# Altium PCB PCB_MCU.PcbDoc (part 1 of 2)
Units mil, origin at the board's own origin, x right, y up, seen from the top; angles counter-clockwise.
Board outline 6125 x 4280 mil, 4 copper layers (Top Layer, Layer 1, Layer 2, Bottom Layer), stack 64.567 mil thick; 69 components, 43 nets, 240 pads, 64 vias.
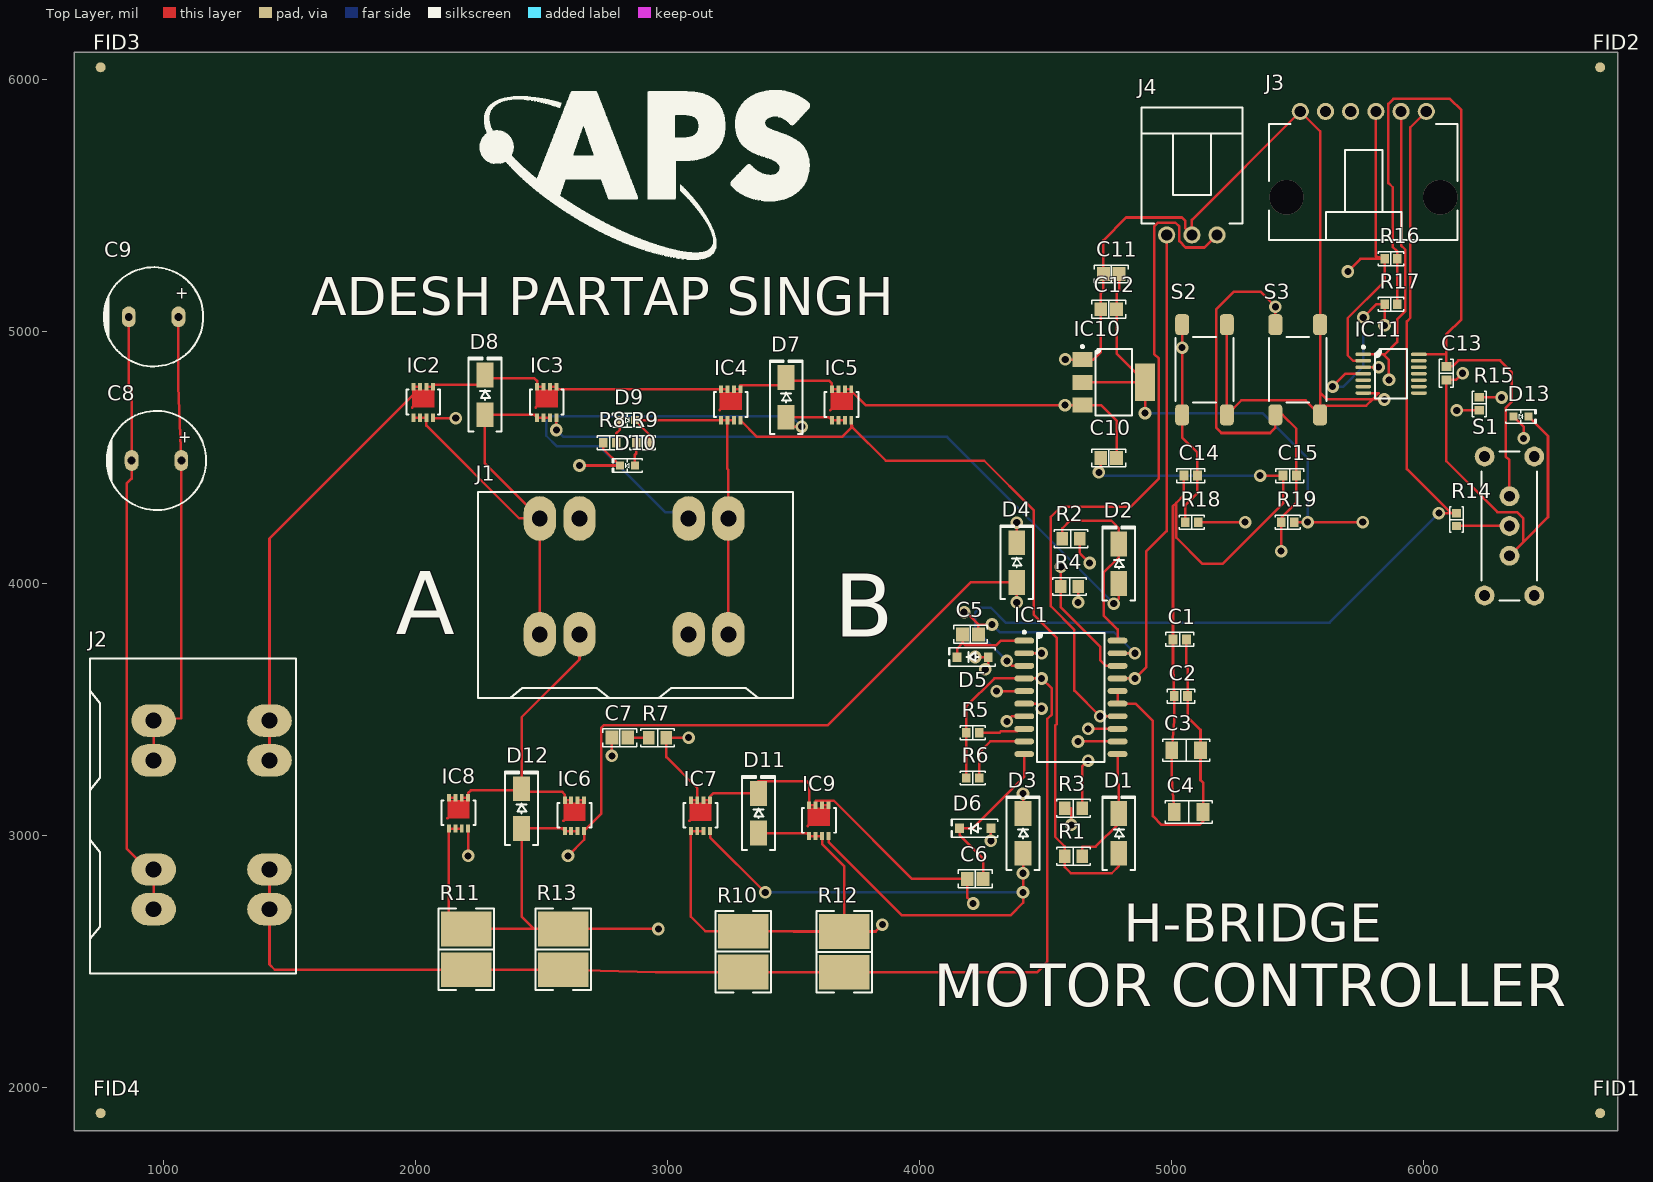
[diagram p0: Top Layer view]
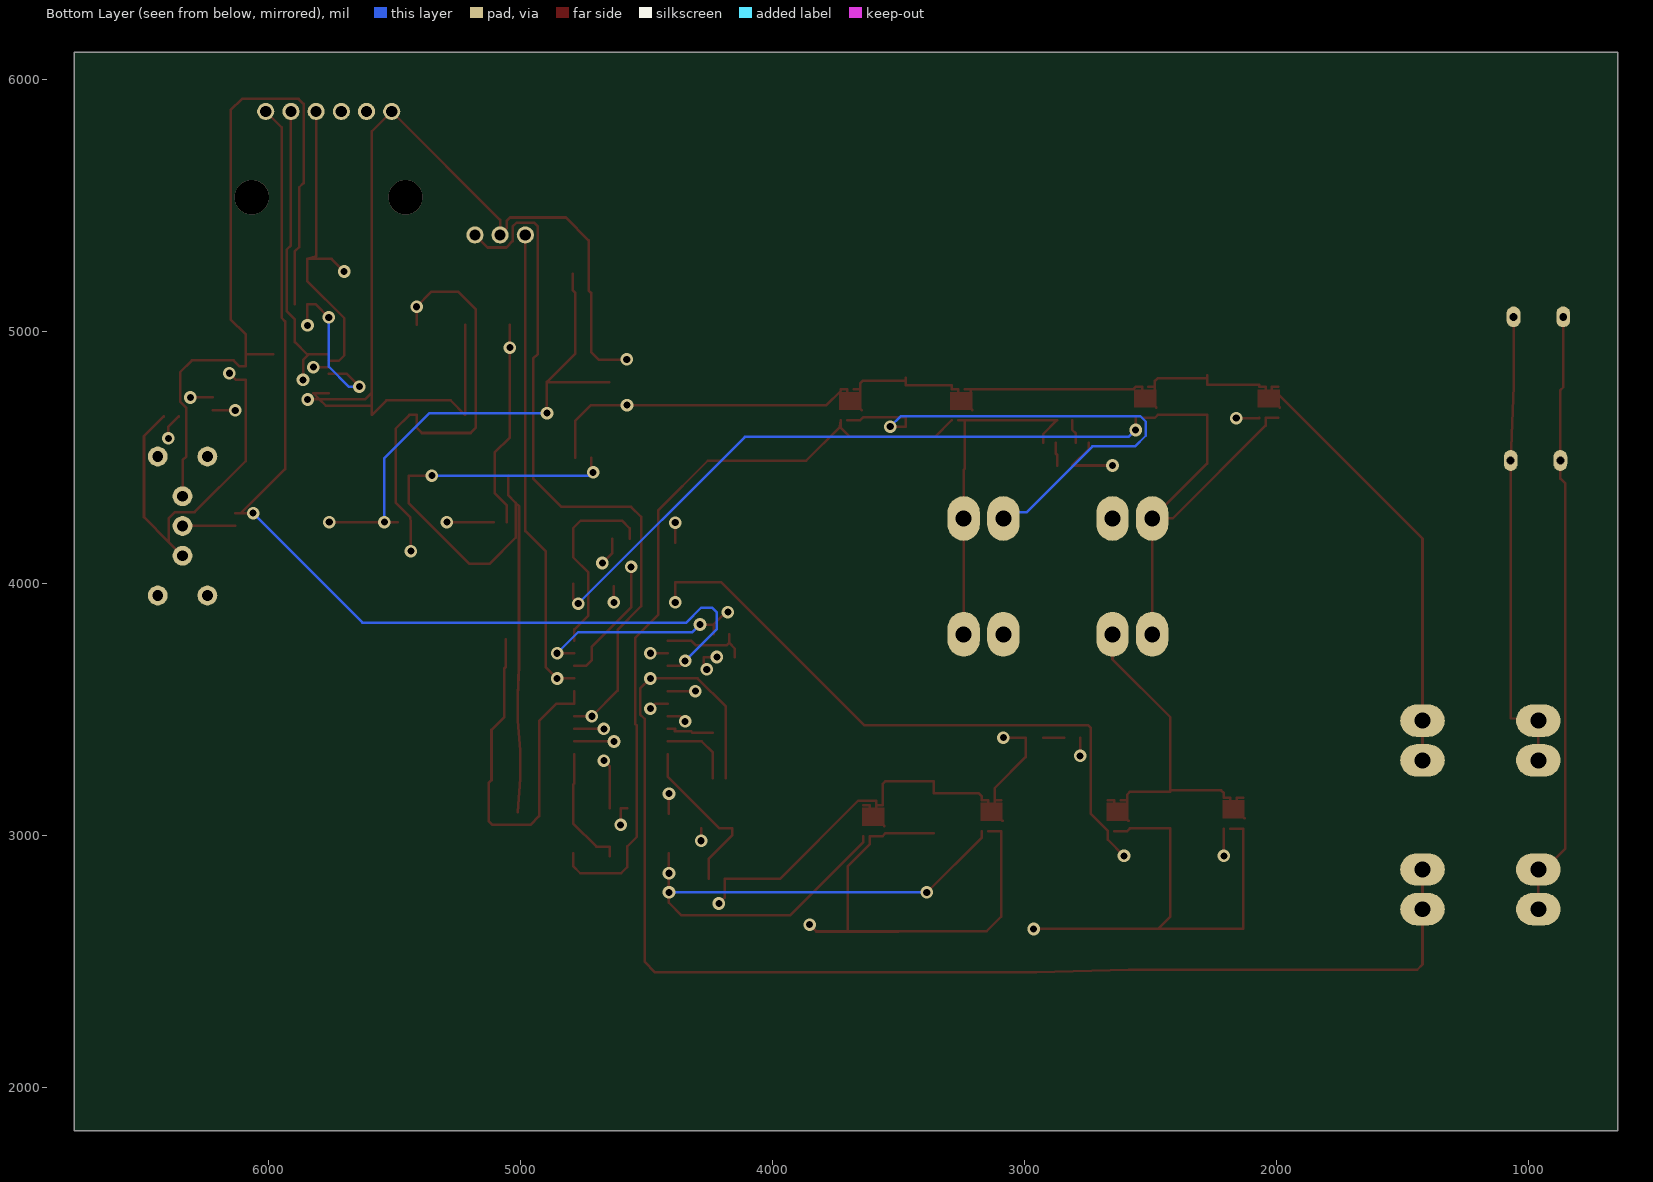
[diagram p1: Bottom Layer view, seen from below]
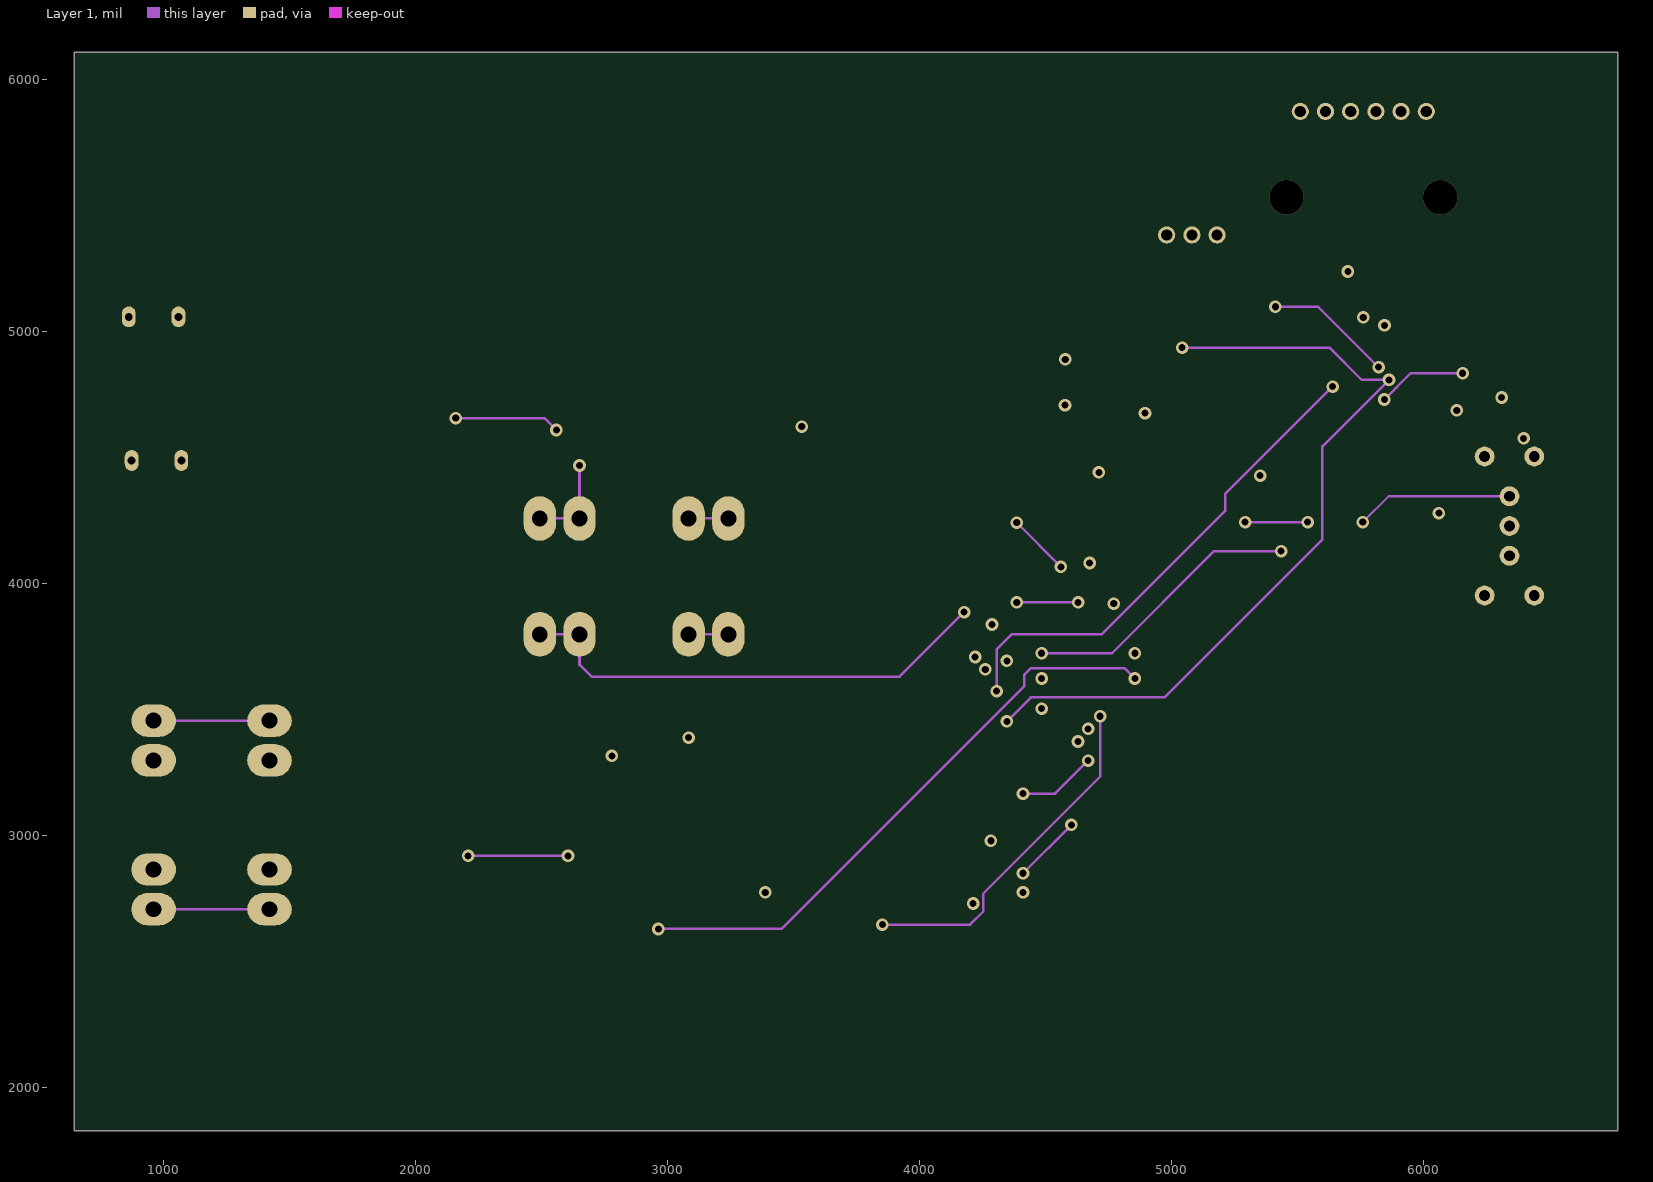
[diagram p2: Layer 1]
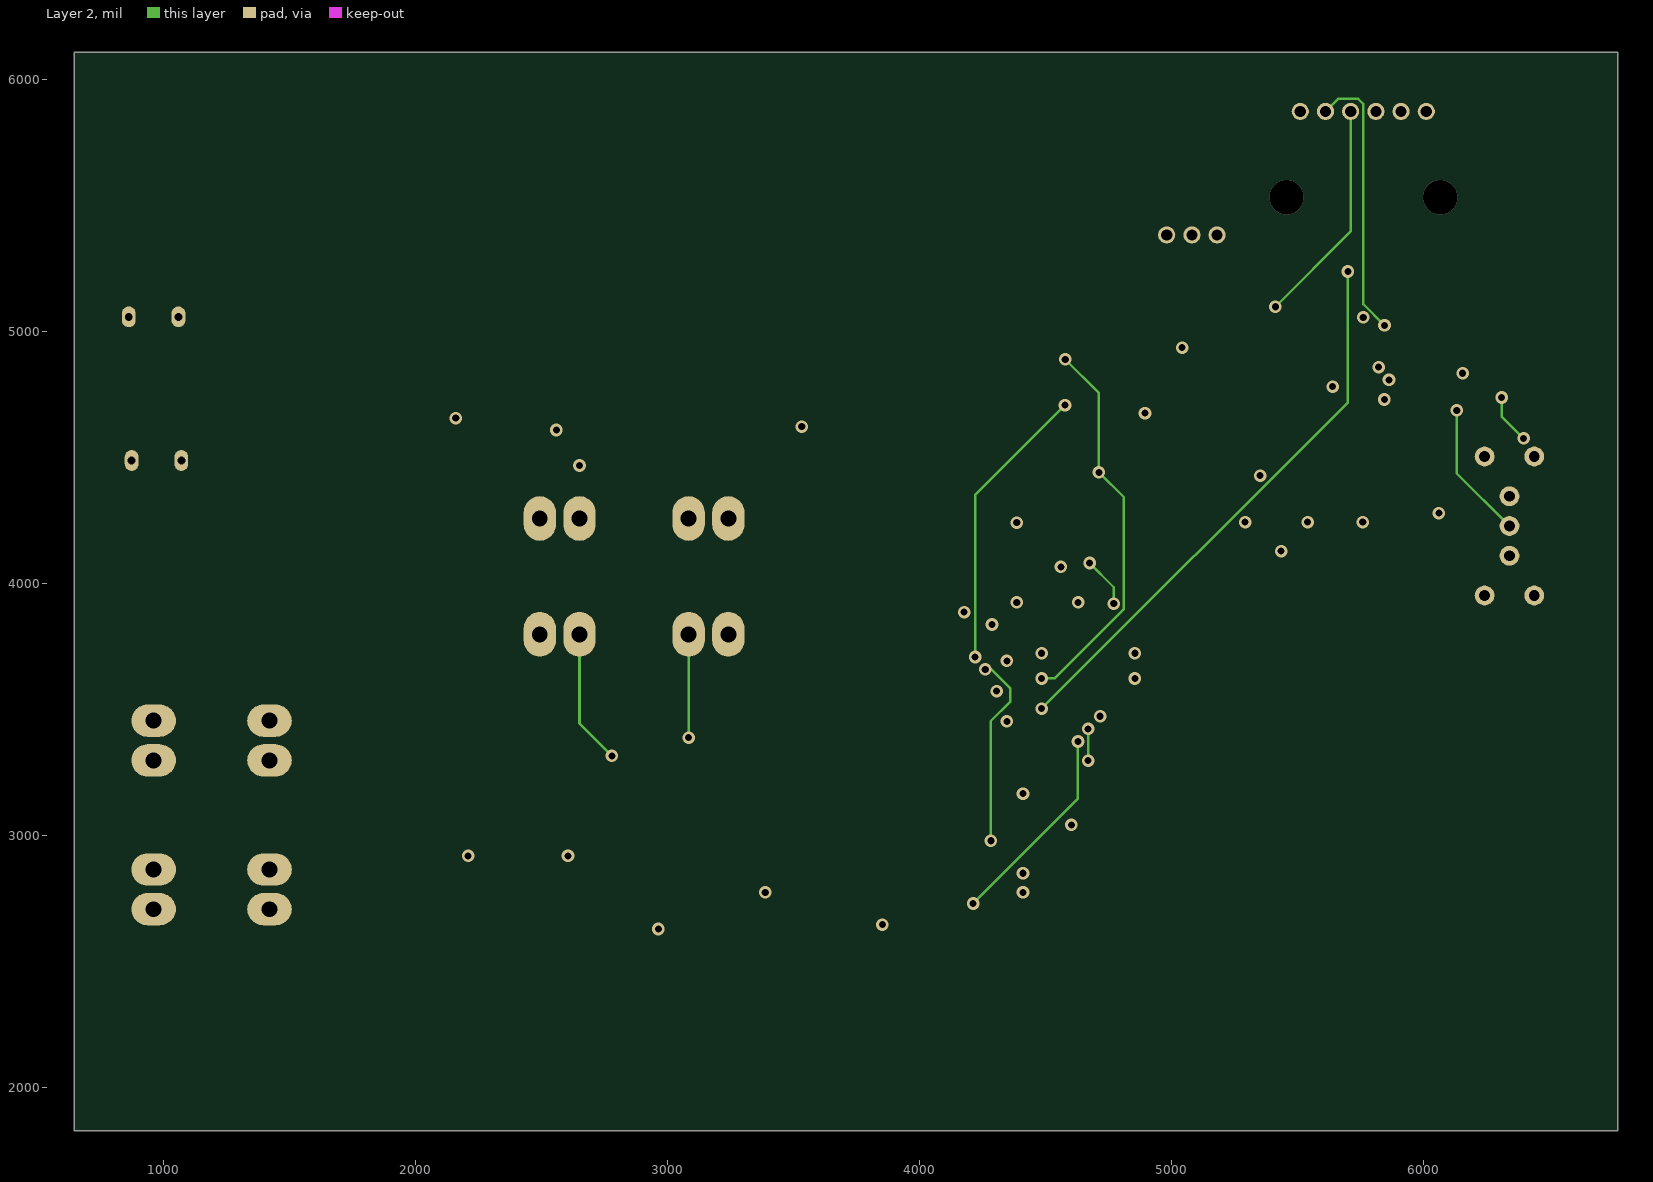
[diagram p3: Layer 2]
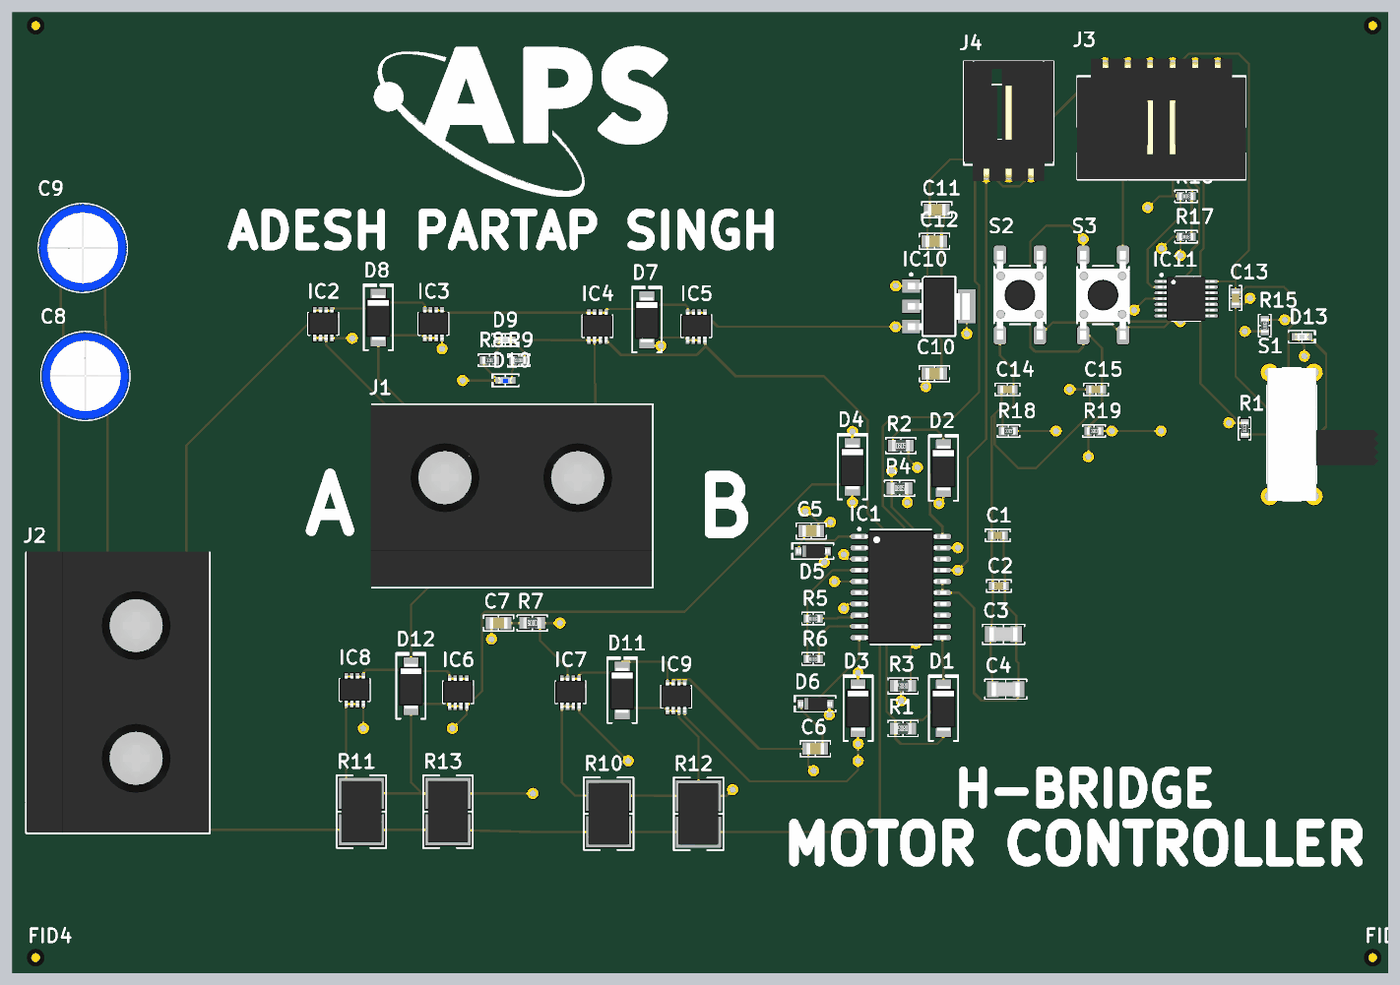
[diagram p4: 3D render of the assembled board from above, using the file's embedded part models]

## Layer stack, top to bottom
Top Solder: solder mask 0.4, Solder Resist, Dk 3.5
Top Layer: signal copper 2.7559
Dielectric 2: prepreg 7.874, PP-006, Dk 4.6
Layer 1: signal copper 0.689
Dielectric 1: dielectric 41.9291, FR-4, Dk 4.6
Layer 2: signal copper 0.689
Dielectric 3: prepreg 7.874, PP-006, Dk 4.6
Bottom Layer: signal copper 2.7559
Bottom Solder: solder mask 0.4, Solder Resist, Dk 3.5

## Board outline
645,1830 6770,1830 6770,6110 645,6110

## Design rules (kind name [scope] priority, off if disabled: settings)
Clearance [All] p1: gap=10 ignorepadtopadclearanceinfootprint=FALSE except(0: Arc-Hole Track-Hole SMDPad-Hole THPad-Hole Via-Hole Fill-Hole Poly-Hole Region-Hole Text-Hole)
PolygonConnect [All] p1: connectstyle=Relief reliefconductorwidth=10 reliefentries=4 polygonreliefangle="90 Angle" airgapwidth=10
RoutingVias [All] p1: holewidth=28 width=50 viastyle="Through Hole" minholewidth=28 minwidth=50 maxholewidth=28 maxwidth=50
SolderMaskExpansion [All] p1: expansion=4 istentingtop=FALSE
Width [All] p1: maxlimit=10 minlimit=10 preferedwidth=10
30 further rules are at their usual default settings.

## Components (designator, comment, footprint, x,y, rotation, side; value= is the part's Value field where it differs from the comment)
C1 "0.1 µF" "CAP 0603_1608" 5031.57,3780 r0 top
C2 "0.1 µF" "CAP 0603_1608" 5036.57,3555 r0 top
C3 "10 µF" "CAP 1206_3216 - 0.8MM" 5057.09,3340 r0 top
C4 "10 µF" "CAP 1206_3216 - 0.8MM" 5067.09,3095 r0 top
C5 "1 µF" "CAP 0805_2012" 4201.5,3800 r180 top
C6 "1 µF" "CAP 0805_2012" 4220,2830 r0 top
C7 "0.22µF" "CAP 0805_2012" 2810,3390 r180 top
C8 "330 µF" "CAP TH ALPOLY D10.00mm S5.00mm H13.50mm" 971.58,4490 r0 top
C9 "330 µF" "CAP TH ALPOLY D10.00mm S5.00mm H13.50mm" 960,5060 r0 top
C10 "1 µF" "CAP 0805_2012" 4750,4500 r0 top
C11 "1 µF" "CAP 0805_2012" 4760,5230 r0 top
C12 "4.7 µF" "CAP 0805_2012" 4750,5090 r0 top
C13 "0.1µF" "CAP 0603_1608" 6090,4836.57 r90 top
C14 "0.1µF" "CAP 0603_1608" 5075,4430 r0 top
C15 "0.1µF" "CAP 0603_1608" 5468.43,4430 r0 top
D1 "CDBA340L-G" "DO214AC SMA" 4790,3010 r90 top
D2 "CDBA340L-G" "DO214AC SMA" 4790,4080 r90 top
D3 "CDBA340L-G" "DO214AC SMA" 4410,3010 r90 top
D4 "CDBA340L-G" "DO214AC SMA" 4385,4085 r90 top
D5 "1N4148WTR" SOD-123 4210,3710 r180 top
D6 "1N4148WTR" SOD-123 4220,3030 r180 top
D7 "CDBA340L-G" "DO214AC SMA" 3470,4740 r90 top
D8 "CDBA340L-G" "DO214AC SMA" 2275,4750 r90 top
D9 "Green" "LED 0603_1608 GREEN" 2840,4650 r0 top
D10 "Blue" "LED 0603_1608 BLUE" 2840,4470 r180 top
D11 "CDBA340L-G" "DO214AC SMA" 3360,3090 r90 top
D12 "CDBA340L-G" "DO214AC SMA" 2420,3108.74 r90 top
D13 "Green" "LED 0603_1608 GREEN" 6385.47,4664.41 r0 top
FID1 "Fiducial" Fiducial-1mm 6700,1900 r90 top
FID2 "Fiducial" Fiducial-1mm 6700,6050 r90 top
FID3 "Fiducial" Fiducial-1mm 750,6050 r90 top
FID4 "Fiducial" Fiducial-1mm 750,1900 r90 top
IC1 "HIP4081AIBZ" "INTERSIL SOIC-20 WIDE" 4600,3550 r0 top
IC2 "PSMN1R5-25MLHX" "NEXPERIA LFPAK33 SOT1210" 2030,4720 r0 top
IC3 "PSMN1R5-25MLHX" "NEXPERIA LFPAK33 SOT1210" 2520,4720 r0 top
IC4 "PSMN1R5-25MLHX" "NEXPERIA LFPAK33 SOT1210" 3250,4710 r0 top
IC5 "PSMN1R5-25MLHX" "NEXPERIA LFPAK33 SOT1210" 3690,4710 r0 top
IC6 "PSMN1R5-25MLHX" "NEXPERIA LFPAK33 SOT1210" 2630,3080 r0 top
IC7 "PSMN1R5-25MLHX" "NEXPERIA LFPAK33 SOT1210" 3130,3080 r0 top
IC8 "PSMN1R5-25MLHX" "NEXPERIA LFPAK33 SOT1210" 2170,3090 r0 top
IC9 "PSMN1R5-25MLHX" "NEXPERIA LFPAK33 SOT1210" 3600,3060 r0 top
IC10 "LDL1117S33R" "ST SOT-223" 4770,4800 r0 top
IC11 "SN74LVC14APWR" "TI TSSOP-14 PW" 5870.22,4834.41 r0 top
J1 "0399200302" "MOLEX 0399200302" 2866.54,4029.92 r0 top
J2 "0399200302" "MOLEX 0399200302" 1190.08,3083.46 r270 top
J3 "0705550005" "MOLEX SDA-70555-6PIN" 5760,5630 r180 top
J4 "0705530002" "MOLEX SDA-70553-3PIN" 5080,5630 r0 top
R1 "20 Ohms" "RES 0805_2012" 4610,2920 r180 top
R2 "20 Ohms" "RES 0805_2012" 4600,4180 r0 top
R3 "20 Ohms" "RES 0805_2012" 4610,3110 r180 top
R4 "20 Ohms" "RES 0805_2012" 4594.45,3990 r0 top
R5 "75 kOhms" "RES 0603_1608" 4210,3410 r0 top
R6 "75 kOhms" "RES 0603_1608" 4210,3230 r0 top
R7 "10 kOhms" "RES 0805_2012" 2960,3390 r180 top
R8 "2.2 kOhms" "RES 0603_1608" 2770,4560 r180 top
R9 "2.2 kOhms" "RES 0603_1608" 2900,4560 r180 top
R10 "2 mOhms" "VISHAY WSHP2818" 3300,2540.9 r270 top
R11 "2 mOhms" "VISHAY WSHP2818" 2200,2550 r90 top
R12 "2 mOhms" "VISHAY WSHP2818" 3700,2540 r270 top
R13 "2 mOhms" "VISHAY WSHP2818" 2585,2550 r90 top
R14 "1 kOhms" "RES 0603_1608" 6130,4255.59 r90 top
R15 "120 Ohms" "RES 0603_1608" 6220,4714.41 r90 top
R16 "1 kOhms" "RES 0603_1608" 5870,5290 r0 top
R17 "1 kOhms" "RES 0603_1608" 5870,5110 r0 top
R18 "1 kOhms" "RES 0603_1608" 5079.41,4245 r0 top
R19 "1 kOhms" "RES 0603_1608" 5460,4245 r0 top
S1 "SK-12F17-G 7" "C&K SK-12F17-G 7" 6340,4230 r90 top
S2 "FSM6JSMAASTR" "TE FSM6JSMA" 5130,4850 r0 top
S3 "FSM6JSMAASTR" "TE FSM6JSMA" 5500,4850 r0 top

## Footprints (in the part's own frame and the unit in brackets; to place one, negate y for a bottom-side part, rotate by r counter-clockwise, add the part's x,y. Pads: shape width x height; smd on the part's side, far side on the other; paste and mask are expansions set on the pad)
"C&K SK-12F17-G 7" [mm]
  round 2 hole 1.1: 1(-3,0) 2(0,0) 3(3,0) M(-7,-2.5) M(-7,2.5) M(7,-2.5) M(7,2.5)
  silkscreen extent -7.5,-2.8 7.5,2.8, body extent -7.5,-9.8 7.5,2.8, height 8
"CAP 0603_1608" [mm]
  rect 0.9x1 smd: 1(-0.675,0) 2(0.675,0)
  silkscreen extent -1.4,-0.7 1.4,0.7, body extent -0.8,-0.41 0.8,0.41, height 0.82
"CAP 0805_2012" [mm]
  rect 1.3x1.4 smd: 1(-0.8,0) 2(0.8,0)
  silkscreen extent -1.7,-0.9 1.7,0.9, body extent -1,-0.64 1,0.64, height 1.26
"CAP 1206_3216 - 0.8MM" [mm]
  rect 1.3x1.8 smd: 1(-1.45,0) 2(1.45,0)
  silkscreen extent -2.38,-1.13 2.37,1.13, body extent -1.6,-0.8 1.6,0.8, height 0.8
"CAP TH ALPOLY D10.00mm S5.00mm H13.50mm" [mm]
  oval 1.4x2.1 hole 0.8: 1(2.5,0) 2(-2.5,0)
  silkscreen extent -5,-5 5,5, body extent -5.01,-5 5,5, height 13.5
"DO214AC SMA" [mm]
  rect 2.5x1.7 smd: 1(-2,0) 2(2,0)
  silkscreen extent -3.68,-1.65 3.75,1.65, body extent -2.6,-1.37 2.6,1.37, height 2.4
Fiducial-1mm [mm]
  round 1 smd paste-1 mask+0.5: F(0,0)
  Top Layer pour cut-out: -1,0 -1,0.098 -0.962,0.292 -0.886,0.474 -0.777,0.637 -0.637,0.777 -0.474,0.886 -0.292,0.962 -0.098,1 0,1 0.098,1 0.292,0.962 0.474,0.886 0.637,0.777 0.777,0.637 0.886,0.474 0.962,0.292 1,0.098 1,0 1,-0.098 0.962,-0.292 0.886,-0.474 0.777,-0.637 0.637,-0.777 0.474,-0.886 0.292,-0.962 0.098,-1 0,-1 -0.098,-1 -0.292,-0.962 -0.474,-0.886 -0.637,-0.777 -0.777,-0.637 -0.886,-0.474 -0.962,-0.292 -1,-0.098 -1,0
"INTERSIL SOIC-20 WIDE" [mm]
  oval 2x0.6 smd: 1(-4.7,5.715) 2(-4.7,4.445) 3(-4.7,3.175) 4(-4.7,1.905) 5(-4.7,0.635) 6(-4.7,-0.635) 7(-4.7,-1.905) 8(-4.7,-3.175) 9(-4.7,-4.445) 10(-4.7,-5.715) 11(4.7,-5.715) 12(4.7,-4.445) 13(4.7,-3.175) 14(4.7,-1.905) 15(4.7,-0.635) 16(4.7,0.635) 17(4.7,1.905) 18(4.7,3.175) 19(4.7,4.445) 20(4.7,5.715)
  silkscreen extent -4.82,-6.5 3.4,6.69, body extent -5.16,-6.4 5.16,6.4, height 2.65
"LED 0603_1608 BLUE" [mm]
  rect 0.8x0.8 smd: 1(-0.75,0) 2(0.75,0)
  silkscreen extent -1.52,-0.7 1.52,0.7, body extent -0.8,-0.4 0.8,0.4, height 0.53
"LED 0603_1608 GREEN" [mm]
  rect 0.8x0.8 smd: 1(-0.75,0) 2(0.75,0)
  silkscreen extent -1.52,-0.7 1.52,0.7, body extent -0.8,-0.4 0.8,0.4, height 0.53
"MOLEX 0399200302" [mm]
  oval 3.25x4.5 hole 1.6: 1(-9.5,-5.84) 1(-9.5,5.84) 1(-5.5,-5.84) 1(-5.5,5.84) 2(5.5,-5.84) 2(5.5,5.84) 2(9.5,-5.84) 2(9.5,5.84)
  silkscreen extent -15.75,-12.25 16,8.5, body extent -15.88,-12.19 15.88,8.43, height 35.05
"MOLEX SDA-70553-3PIN" [mm]
  round 1.73 hole 1.13: 1(-2.54,-6.223) 2(0,-6.223) 3(2.54,-6.223)
  silkscreen extent -5.08,-5.08 5.08,6.6, body extent -5.08,-6.92 5.08,6.67, height 6.98
"MOLEX SDA-70555-6PIN" [mm]
  round 1.73 hole 1.13: 1(-6.35,-6.223) 2(-3.81,-6.223) 3(-1.27,-6.223) 4(1.27,-6.223) 5(3.81,-6.223) 6(6.35,-6.223)
  silkscreen extent -9.51,-4.95 9.51,6.73, body extent -9.53,-6.92 9.52,6.67, height 6.98
"NEXPERIA LFPAK33 SOT1210" [mm]
  rect 0.4x0.75 smd: D(-0.975,1.575) D(-0.325,1.575) D(0.325,1.575) D(0.975,1.575)
  rect 0.4x0.83 smd: G(0.975,-1.535) S(-0.975,-1.535) S(-0.325,-1.535) S(0.325,-1.535)
  Top Layer region: -1.125,-0.52 1.125,-0.52 1.125,1.33 -1.125,1.33
  silkscreen extent -1.7,-1.2 1.7,1.3, body extent -1.7,-1.75 1.7,1.65, height 0.9
"RES 0603_1608" [mm]
  rect 0.85x0.95 smd: 1(-0.65,0) 2(0.65,0)
  silkscreen extent -1.27,-0.7 1.27,0.7, body extent -0.8,-0.4 0.8,0.4, height 0.45
"RES 0805_2012" [mm]
  rect 1.15x1.35 smd: 1(-0.875,0) 2(0.875,0)
  silkscreen extent -1.7,-0.9 1.7,0.9, body extent -1,-0.62 1,0.63, height 0.6
SOD-123 [mm]
  rect 0.9x0.95 smd: 1(-1.575,0) 2(1.575,0)
  silkscreen extent -2.3,-0.92 2.41,0.92, body extent -1.86,-0.78 1.86,0.77, height 1.35
"ST SOT-223" [mm]
  rect 2x1.5 smd: 1(-3.15,2.3) 2(-3.15,0) 3(-3.15,-2.3)
  rect 2x3.8 smd: 4(3.15,0)
  silkscreen extent -3.27,-3.35 1.85,3.72, body extent -3.52,-3.25 3.5,3.25, height 1.8
"TE FSM6JSMA" [mm]
  rrect50% 1.4x2.1 smd: 1(2.25,4.55) 2(2.25,-4.55) 3(-2.25,4.55) 4(-2.25,-4.55)
  silkscreen extent -2.92,-3.3 2.92,3.3, body extent -3,-5 3,5, height 7.11
"TI TSSOP-14 PW" [mm]
  oval 1.6x0.35 smd: 1(-2.8,1.95) 2(-2.8,1.3) 3(-2.8,0.65) 4(-2.8,0) 5(-2.8,-0.65) 6(-2.8,-1.3) 7(-2.8,-1.95) 8(2.8,-1.95) 9(2.8,-1.3) 10(2.8,-0.65) 11(2.8,0) 12(2.8,0.65) 13(2.8,1.3) 14(2.8,1.95)
  silkscreen extent -2.92,-2.5 1.6,2.8, body extent -3.21,-2.5 3.21,2.5, height 1.2
"VISHAY WSHP2818" [mm]
  rect 3.5x5.1 smd: 1(-2.055,0) 2(2.055,0)
  silkscreen extent -4.1,-2.8 4.1,2.8, body extent -3.55,-2.3 3.55,2.3, height 1.5

## Part data
C1 C2: library part C0603C104K8RAC7867, "CAP CER 0.1UF 10V X7R 0603", Device Package="0603 (1608 Metric)", Manufacturer=KEMET, Operating Temperature="-55°C ~ 125°C", Supplier Part Number 1=399-C0603C104K8RAC7867CT-ND, Temperature Coefficient=X7R, Tolerance=±10%, Voltage - Rated=10V, Applications="Bypass, Decoupling", Capacitance="0.1 µF", ComponentLink1Description=Datasheet, ComponentLink1URL=https://api.kemet.com/component-edge/download/datasheet/C0603C104K8RACTU.pdf, ComponentLink2Description="DigiKey Link", ComponentLink2URL=https://www.digikey.com/en/products/detail/kemet/C0603C104K8RAC7867/411094, lastupdated="05/03/2022 16:47:38", Lifecycle Status=Active, Minimum Order=1, Mounting Type="Surface Mount, MLCC", Package / Case="0603 (1608 Metric)", Packaging=TapeAndReel, Part Number=C0603C104K8RAC7867, Part Status=Active, partid=35650, Price=0.01, Series="SMD Comm X7R", Size / Dimension="0.063\" L x 0.031\" W (1.60mm x 0.80mm)", Supplier 1=DigiKey, Thickness (Max)="0.034\" (0.87mm)"
C3 C4: library part GRT31CR61H106ME01L, "CAP CER 10UF 50V X5R 1206", Device Package="1206 (3216 Metric)", Manufacturer="Murata Electronics", Operating Temperature="-55°C ~ 85°C", Ratings=AEC-Q200, Supplier Part Number 1=490-12457-1-ND, Temperature Coefficient=X5R, Tolerance=±20%, Voltage - Rated=50V, Applications=Automotive, Capacitance="10 µF", ComponentLink1Description=Datasheet, ComponentLink1URL=https://search.murata.co.jp/Ceramy/image/img/A01X/G101/ENG/GRT31CR61H106ME01-01.pdf, ComponentLink2Description="DigiKey Link", ComponentLink2URL=https://www.digikey.com/en/products/detail/murata-electronics/GRT31CR61H106ME01L/5416879, lastupdated="04/03/2022 17:33:28", Lifecycle Status=Active, Minimum Order=1, Mounting Type="Surface Mount, MLCC", Package / Case="1206 (3216 Metric)", Packaging=TapeAndReel, Part Number=GRT31CR61H106ME01L, Part Status=Active, partid=22693, Price=0.09, Series=GRT, Size / Dimension="0.126\" L x 0.063\" W (3.20mm x 1.60mm)", Supplier 1=DigiKey, Thickness (Max)="0.071\" (1.80mm)"
C5 C6 C10 C11: library part 08055C105KAZ2A, "CAP CER 1UF 50V X7R 0805", Device Package="0805 (2012 Metric)", Manufacturer="KYOCERA AVX", Operating Temperature="-55°C ~ 125°C", Supplier Part Number 1=478-08055C105KAZ2ACT-ND, Temperature Coefficient=X7R, Tolerance=±10%, Voltage - Rated=50V, Applications="Boardflex Sensitive", Capacitance="1 µF", ComponentLink1Description=Datasheet, ComponentLink1URL=https://datasheets.kyocera-avx.com/FlexitermMLCC.pdf, ComponentLink2Description="DigiKey Link", ComponentLink2URL=https://www.digikey.com/en/products/detail/kyocera-avx/08055C105KAZ2A/11568641, Features="Soft Termination", lastupdated="05/03/2022 16:50:45", Lifecycle Status=Active, Minimum Order=1, Mounting Type="Surface Mount, MLCC", Package / Case="0805 (2012 Metric)", Packaging=TapeAndReel, Part Number=08055C105KAZ2A, Part Status=Active, partid=33480, Price=0.06, Series=-, Size / Dimension="0.079\" L x 0.049\" W (2.01mm x 1.25mm)", Supplier 1=DigiKey, Thickness (Max)="0.055\" (1.40mm)"
C7: library part 08055C224KAZ2A, "CAP CER 0.22UF 50V X7R 0805", Device Package="0805 (2012 Metric)", Manufacturer="AVX Corporation", Operating Temperature="-55°C ~ 125°C", Supplier Part Number 1=478-3555-1-ND, Temperature Coefficient=X7R, Tolerance=±10%, Voltage - Rated=50V, Applications="Boardflex Sensitive", Capacitance=0.22µF, ComponentLink1Description=Datasheet, ComponentLink1URL=http://datasheets.avx.com/FlexitermMLCC.pdf, ComponentLink2Description="DigiKey Link", ComponentLink2URL=http://digikey.com/product-detail/en/avx-corporation/08055C224KAZ2A/478-3555-1-ND/1024908, Features="Soft Termination", lastupdated="02/09/2020 01:04:11", Lifecycle Status=Active, Minimum Order=1, Mounting Type="Surface Mount, MLCC", Package / Case="0805 (2012 Metric)", Packaging=TapeAndReel, Part Number=08055C224KAZ2A, Part Status=Active, partid=16770, Price=0.07, Series=FLEXITERM®, Size / Dimension="0.079\" L x 0.049\" W (2.01mm x 1.25mm)", Supplier 1=DigiKey, Thickness (Max)="0.055\" (1.40mm)"
C8 C9: library part 337AVG035MGBJ, "CAP ALUM POLY 330UF 20% 35V T/H", Device Package="Radial, Can", ESR (Equivalent Series Resistance)=24mOhm, Lifetime @ Temp.="1500 Hrs @ 125°C", Manufacturer="Illinois Capacitor", Operating Temperature="-55°C ~ 125°C", Ripple Current @ High Frequency="3.4 A @ 100 kHz", Ripple Current @ Low Frequency="170 mA @ 120 Hz", Supplier Part Number 1=1572-1435-ND, Tolerance=±20%, Voltage - Rated="35 V", Applications="General Purpose", Capacitance="330 µF", ComponentLink1Description=Datasheet, ComponentLink1URL=http://www.illinoiscapacitor.com/pdf/seriesDocuments/AVG%20series.pdf, ComponentLink2Description="DigiKey Link", ComponentLink2URL=https://www.digikey.com/en/products/detail/illinois-capacitor/337AVG035MGBJ/5412303, Height - Seated (Max)="0.532\" (13.50mm)", lastupdated="05/03/2022 17:42:14", Lead Spacing="0.197\" (5.00mm)", Lifecycle Status=Active, Minimum Order=1, Mounting Type="Through Hole", Package / Case="Radial, Can", Packaging=Bulk, Part Number=337AVG035MGBJ, Part Status=Active, partid=4548, Price=1.51, Series=AVG, Size / Dimension="0.394\" Dia (10.00mm)", Supplier 1=DigiKey, Type=Polymer
C12: library part 885012107009, "CAP CER 4.7UF 10V X5R 0805", Device Package="0805 (2012 Metric)", Manufacturer="Würth Elektronik", Operating Temperature="-55°C ~ 85°C", Supplier Part Number 1=732-7619-1-ND, Temperature Coefficient=X5R, Tolerance=±20%, Voltage - Rated=10V, Applications="General Purpose", Capacitance="4.7 µF", ComponentLink1Description=Datasheet, ComponentLink1URL=https://katalog.we-online.de/pbs/datasheet/885012107009.pdf, ComponentLink2Description="DigiKey Link", ComponentLink2URL=https://www.digikey.com/en/products/detail/würth-elektronik/885012107009/5453474, lastupdated="05/03/2022 16:51:07", Lifecycle Status=Active, Minimum Order=1, Mounting Type="Surface Mount, MLCC", Package / Case="0805 (2012 Metric)", Packaging=TapeAndReel, Part Number=885012107009, Part Status=Active, partid=14493, Price=0.09, Series=WCAP-CSGP, Size / Dimension="0.079\" L x 0.049\" W (2.00mm x 1.25mm)", Supplier 1=DigiKey, Thickness (Max)="0.053\" (1.35mm)"
C13 C14 C15: library part 06035C104MAT2A, "CAP CER 0.1UF 50V X7R 0603", Device Package="0603 (1608 Metric)", Manufacturer="AVX Corporation", Operating Temperature="-55°C ~ 125°C", Supplier Part Number 1=478-7928-1-ND, Temperature Coefficient=X7R, Tolerance=±20%, Voltage - Rated=50V, Applications="General Purpose", Capacitance=0.1µF, ComponentLink1Description=Datasheet, ComponentLink1URL=http://datasheets.avx.com/X7RDielectric.pdf, ComponentLink2Description="DigiKey Link", ComponentLink2URL=http://digikey.com/product-detail/en/avx-corporation/06035C104MAT2A/478-7928-1-ND/3881551, lastupdated="02/09/2020 01:03:35", Lifecycle Status=Active, Minimum Order=1, Mounting Type="Surface Mount, MLCC", Package / Case="0603 (1608 Metric)", Packaging=TapeAndReel, Part Number=06035C104MAT2A, Part Status=Active, partid=2734, Price=0.02, Series=-, Size / Dimension="0.063\" L x 0.032\" W (1.60mm x 0.81mm)", Supplier 1=DigiKey, Thickness (Max)="0.035\" (0.90mm)"
D1 D2 D3 D4 D7 D8 D11 D12: "DIODE SCHOTTKY 40V 3A DO214AC", Current - Average Rectified (Io)=3A, Current - Reverse Leakage @ Vr="1.5 mA @ 40 V", Manufacturer="Comchip Technology", Operating Temperature - Junction="125°C (Max)", Package / Case="DO-214AC, SMA", Supplier Device Package="DO-214AC (SMA)", Supplier Part Number 1=641-1258-1-ND, Voltage - DC Reverse (Vr) (Max)="40 V", Voltage - Forward (Vf) (Max) @ If="400 mV @ 3 A", ComponentLink1Description=Datasheet, ComponentLink1URL=http://www.comchiptech.com/admin/files/product/CDBA340L-HF%20RevC514368.pdf, ComponentLink2Description="DigiKey Link", ComponentLink2URL=https://www.digikey.com/en/products/detail/comchip-technology/CDBA340L-G/1249117, Diode Type=Schottky, lastupdated="04/03/2022 18:07:12", Lifecycle Status=Active, Minimum Order=1, Mounting Type="Surface Mount", Packaging=TapeAndReel, Part Number=CDBA340L-G, Part Status=Active, partid=2091, Price=0.20, Series=-, Speed="Fast Recovery =< 500ns, > 200mA (Io)", Supplier 1=DigiKey
D5 D6: "DIODE GEN PURP 75V 250MA SOD123", Capacitance @ Vr, F="4pF @ 0V, 1MHz", Current - Average Rectified (Io)="250mA (DC)", Current - Reverse Leakage @ Vr="2.5 µA @ 75 V", Manufacturer="SMC Diode Solutions", Operating Temperature - Junction="-55°C ~ 150°C", Package / Case=SOD-123, Supplier Part Number 1=1655-1360-1-ND, Voltage - DC Reverse (Vr) (Max)="75 V", Voltage - Forward (Vf) (Max) @ If="1.25 V @ 150 mA", ComponentLink1Description=Datasheet, ComponentLink1URL=http://www.smc-diodes.com/propdf/1N4148W%20N0571%20REV.D.pdf, ComponentLink2Description="DigiKey Link", ComponentLink2URL=https://www.digikey.com/en/products/detail/smc-diode-solutions/1N4148WTR/6022450, Diode Type=Standard, lastupdated="04/03/2022 18:07:21", Lifecycle Status=Active, Minimum Order=1, Mounting Type="Surface Mount", Packaging=TapeAndReel, Part Number=1N4148WTR, Part Status=Active, partid=1049, Price=0.02, Reverse Recovery Time (trr)="4 ns", Series=-, Speed="Fast Recovery =< 500ns, > 200mA (Io)", Supplier 1=DigiKey, Supplier Device Package=SOD-123
D9 D13: library part XZMG53W-1, "LED GREEN CLEAR CHIP SMD", Current - Test=20mA, Device Package="0603 (1608 Metric)", Lens Color=Colorless, Manufacturer=SunLED, Millicandela Rating=11mcd, Supplier Device Package="Chip LED", Supplier Part Number 1=1497-1186-1-ND, Voltage - Forward (Vf) (Typ)=2.2V, Color=Green, ComponentLink1Description=Datasheet, ComponentLink1URL=https://www.sunledusa.com/products/spec/XZMG53W-1.pdf, ComponentLink2Description="DigiKey Link", ComponentLink2URL=https://www.digikey.com/en/products/detail/sunled/XZMG53W-1/4745960, Configuration=Standard, Height (Max)=0.75mm, lastupdated="04/03/2022 18:10:12", Lens Size="1.10mm x 0.80mm", Lens Style="Rectangle with Flat Top", Lens Transparency=Clear, Lifecycle Status=Active, Minimum Order=1, Mounting Type="Surface Mount", Package / Case="0603 (1608 Metric)", Packaging=TapeAndReel, Part Number=XZMG53W-1, Part Status=Active, partid=678, Price=0.04, Series=-, Size / Dimension="1.60mm L x 0.80mm W", Supplier 1=DigiKey, Viewing Angle=120°, Wavelength - Dominant=568nm, Wavelength - Peak=565nm
D10: library part 19-213SUBC/S400-A5/S208-2/TR8, "LED BLUE CLEAR 2SMD", Current - Test=5mA, Device Package="0603 (1608 Metric)", Lens Color=Colorless, Manufacturer="Everlight Electronics Co Ltd", Supplier Device Package=2-SMD, Supplier Part Number 1=1080-1581-1-ND, Voltage - Forward (Vf) (Typ)=2.9V, Color=Blue, ComponentLink1Description=Datasheet, ComponentLink1URL=//media.digikey.com/pdf/Data%20Sheets/Everlight%20PDFs/19-213SUBC-S400-A5-S208-2-TR8.pdf, ComponentLink2Description="DigiKey Link", ComponentLink2URL=https://www.digikey.com/en/products/detail/everlight-electronics-co-ltd/19-213SUBC-S400-A5-S208-2-TR8/8535275, Configuration=Standard, Height (Max)=0.70mm, lastupdated="04/03/2022 18:09:56", Lens Size="1.20mm x 0.80mm", Lens Style="Rectangle with Flat Top", Lens Transparency=Clear, Lifecycle Status=Active, Minimum Order=1, Mounting Type="Surface Mount", Package / Case="0603 (1608 Metric)", Packaging=TapeAndReel, Part Number=19-213SUBC/S400-A5/S208-2/TR8, Part Status=Active, partid=808, Price=0.04, Series=-, Size / Dimension="1.60mm L x 0.80mm W", Supplier 1=DigiKey, Viewing Angle=120°, Wavelength - Peak=468nm
IC1: "IC GATE DRVR HALF-BRIDGE 20SOIC", Current - Peak Output (Source, Sink)="2.6A, 2.4A", Device Package="20-SOIC (0.295\", 7.50mm Width)", High Side Voltage - Max (Bootstrap)=95V, Logic Voltage - VIL, VIH="1V, 2.5V", Manufacturer="Renesas Electronics America Inc.", Operating Temperature="-40°C ~ 125°C (TJ)", Supplier Device Package=20-SOIC, Supplier Part Number 1=HIP4081AIBZ-ND, Voltage - Supply="9.5V ~ 15V", Channel Type=Independent, ComponentLink1Description=Datasheet, ComponentLink1URL=https://www.renesas.com/en-us/www/doc/datasheet/hip4081a.pdf, ComponentLink2Description="DigiKey Link", ComponentLink2URL=//digikey.com/product-detail/en/renesas-electronics-america-inc/HIP4081AIBZ/HIP4081AIBZ-ND/821444, Driven Configuration=Half-Bridge, Gate Type="N-Channel MOSFET", Input Type=Non-Inverting, lastupdated="12/12/2019 08:03:43", Lifecycle Status=0, Minimum Order=1, Mounting Type="Surface Mount", Number of Drivers=4, Package / Case="20-SOIC (0.295\", 7.50mm Width)", Packaging=Tube, Part Number=HIP4081AIBZ, Part Status=Active, partid=4, Price=5.41, Rise / Fall Time (Typ)="10ns, 10ns", Series=-, Supplier 1=DigiKey
IC2 IC3 IC4 IC5 IC6 IC7 IC8 IC9: "MOSFET N-CH 25V 150A LFPAK33", Current - Continuous Drain (Id) @ 25°C="150A (Ta)", Device Package="1210 (3225 Metric)", Drain to Source Voltage (Vdss)="25 V", Drive Voltage (Max Rds On,  Min Rds On)="4.5V, 10V", Input Capacitance (Ciss) (Max) @ Vds="3167 pF @ 12 V", Manufacturer="Nexperia USA Inc.", Operating Temperature="-55°C ~ 175°C (TJ)", Power Dissipation (Max)="106W (Ta)", Supplier Device Package=LFPAK33, Supplier Part Number 1=1727-PSMN1R5-25MLHXCT-ND, ComponentLink1Description=Datasheet, ComponentLink1URL=https://assets.nexperia.com/documents/data-sheet/PSMN1R5-25MLH.pdf, ComponentLink2Description="DigiKey Link", ComponentLink2URL=https://www.digikey.com/en/products/detail/nexperia-usa-inc/PSMN1R5-25MLHX/11205917, FET Type=N-Channel, Gate Charge (Qg) (Max) @ Vgs="58 nC @ 10 V", lastupdated="05/03/2022 14:14:29", Lifecycle Status=Active, Minimum Order=1, Mounting Type="Surface Mount", Package / Case="1210 (3225 Metric)", Packaging=TapeAndReel, Part Number=PSMN1R5-25MLHX, Part Status=Active, Price=0.82, Rds On (Max) @ Id, Vgs="1.81mOhm @ 25A, 10V", Series=-, Supplier 1=DigiKey, Technology="MOSFET (Metal Oxide)", Vgs (Max)=±20V, Vgs(th) (Max) @ Id="2.2V @ 1mA"
IC10: "IC REG LINEAR 3.3V 1.2A SOT223", Current - Output=1.2A, Current - Quiescent (Iq)="500 µA", Manufacturer=STMicroelectronics, Operating Temperature="-40°C ~ 125°C (TJ)", Package / Case="TO-261-4, TO-261AA", Supplier Device Package=SOT-223, Supplier Part Number 1=497-17239-1-ND, Voltage - Input (Max)=18V, Voltage - Output (Min/Fixed)=3.3V, Voltage Dropout (Max)="0.6V @ 1.2A", ComponentLink1Description=Datasheet, ComponentLink1URL=http://www.st.com/content/ccc/resource/technical/document/datasheet/group3/0e/5a/00/ca/10/1a/4f/a5/DM00366442/files/DM00366442.pdf/jcr:content/translations/en.DM00366442.pdf, ComponentLink2Description="DigiKey Link", ComponentLink2URL=https://www.digikey.com/en/products/detail/stmicroelectronics/LDL1117S33R/7102071, lastupdated="05/03/2022 21:27:25", Lifecycle Status=Active, Minimum Order=1, Mounting Type="Surface Mount", Number of Regulators=1, Output Configuration=Positive, Output Type=Fixed, Packaging=TapeAndReel, Part Number=LDL1117S33R, Part Status=Active, Price=0.14, Protection Features="Over Current, Over Temperature, Under Voltage Lockout (UVLO)", PSRR="87dB ~ 65dB (120Hz ~ 100kHz)", Series=-, Supplier 1=DigiKey
IC11: "IC INVERTER 6CH 6-INP 14TSSOP", Current - Output High, Low="24mA, 24mA", Current - Quiescent (Max)="1 µA", Manufacturer="Texas Instruments", Operating Temperature="-40°C ~ 125°C", Package / Case="14-TSSOP (0.173\", 4.40mm Width)", Supplier Device Package=14-TSSOP, Supplier Part Number 1=296-1224-1-ND, Voltage - Supply="1.65V ~ 3.6V", ComponentLink1Description=Datasheet, ComponentLink1URL=http://www.ti.com/general/docs/suppproductinfo.tsp?distId=10&gotoUrl=http%3A%2F%2Fwww.ti.com%2Flit%2Fgpn%2Fsn74lvc14a, ComponentLink2Description="DigiKey Link", ComponentLink2URL=https://www.digikey.com/en/products/detail/texas-instruments/SN74LVC14APWR/276867, Features="Schmitt Trigger", lastupdated="05/03/2022 19:21:42", Lifecycle Status=Active, Logic Level - High="1.3V ~ 2V", Logic Level - Low="0.15V ~ 0.8V", Logic Type=Inverter, Max Propagation Delay @ V, Max CL="6.2ns @ 3.3V, 50pF", Minimum Order=1, Mounting Type="Surface Mount", Number of Circuits=6, Number of Inputs=6, Packaging=TapeAndReel, Part Number=SN74LVC14APWR, Part Status=Active, partid=14, Price=0.11, Series=74LVC, Supplier 1=DigiKey
J1 J2: "TERM BLK 2P SIDE ENTRY 15MM PCB", Color=Black, Current="115 A", Manufacturer=Molex, Supplier Part Number 1=WM20114-ND, Voltage="600 V", ComponentLink1Description=Datasheet, ComponentLink1URL=https://www.molex.com/pdm_docs/sd/399200302_sd.pdf, ComponentLink2Description="DigiKey Link", ComponentLink2URL=https://www.digikey.com/en/products/detail/molex/0399200302/3316297, lastupdated="05/03/2022 16:30:55", Lifecycle Status=Active, Mating Orientation="Horizontal with Board", Minimum Order=1, Mounting Type="Through Hole", Number of Levels=1, Packaging=Bulk, Part Number=0399200302, Part Status=Active, Pitch="0.591\" (15.00mm)", Positions Per Level=2, Price=5.90, Series="Eurostyle 39920", Supplier 1=DigiKey, Wire Gauge="1-8 AWG", Wire Termination="Screw - Rising Cage Clamp"
J3: "CONN HEADER R/A 6POS 2.54MM", Insulation Color=Black, Manufacturer=Molex, Material Flammability Rating="UL94 V-0", Operating Temperature="-40°C ~ 105°C", Supplier Part Number 1=23-0705550005-ND, Voltage Rating=250V, ComponentLink1Description=Datasheet, ComponentLink1URL=https://www.molex.com/pdm_docs/sd/705550001_sd.pdf, ComponentLink2Description="DigiKey Link", ComponentLink2URL=http://digikey.com/product-detail/en/molex/0705550005/23-0705550005-ND/1643402, Connector Type=Header, Contact Finish - Mating=Tin, Contact Finish - Post=Tin, Contact Finish Thickness - Mating="150.0µin (3.81µm)", Contact Length - Mating="0.240\" (6.10mm)", Contact Length - Post="0.130\" (3.30mm)", Contact Material="Phosphor Bronze", Contact Shape=Square, Contact Type="Male Pin", Fastening Type="Latch Holder", Features="Board Guide", Insulation Height="0.215\" (5.45mm)", Insulation Material="Polyester, Glass Filled", lastupdated="13/01/2020 00:04:40", Lifecycle Status=Active, Minimum Order=1, Mounting Type="Through Hole, Right Angle", Number of Positions=6, Number of Positions Loaded=All, Number of Rows=1, Packaging=Tube, Part Number=0705550005, Part Status=Active, partid=102, Pitch - Mating="0.100\" (2.54mm)", Price=1.19, Series="SL 70555", Shrouding="Shrouded - 4 Wall", Style="Board to Cable/Wire", Supplier 1=DigiKey, Termination=Solder
J4: "CONN HEADER R/A 3POS 2.54MM", Insulation Color=Black, Manufacturer=Molex, Material Flammability Rating="UL94 V-0", Operating Temperature="-40°C ~ 105°C", Supplier Part Number 1=WM4901-ND, Voltage Rating=250V, ComponentLink1Description=Datasheet, ComponentLink1URL=https://www.molex.com/pdm_docs/sd/705530002_sd.pdf, ComponentLink2Description="DigiKey Link", ComponentLink2URL=http://digikey.com/product-detail/en/molex/0705530002/WM4901-ND/114955, Connector Type=Header, Contact Finish - Mating=Gold, Contact Finish - Post=Tin, Contact Finish Thickness - Mating="15.0µin (0.38µm)", Contact Length - Mating="0.240\" (6.10mm)", Contact Length - Post="0.130\" (3.30mm)", Contact Material="Phosphor Bronze", Contact Shape=Square, Contact Type="Male Pin", Fastening Type="Latch Holder", Insulation Height="0.215\" (5.45mm)", Insulation Material="Polyester, Glass Filled", lastupdated="12/01/2020 23:55:56", Lifecycle Status=Active, Minimum Order=1, Mounting Type="Through Hole, Right Angle", Number of Positions=3, Number of Positions Loaded=All, Number of Rows=1, Packaging=Tube, Part Number=0705530002, Part Status=Active, partid=86, Pitch - Mating="0.100\" (2.54mm)", Price=1.02, Series="SL 70553", Shrouding="Shrouded - 4 Wall", Style="Board to Cable/Wire", Supplier 1=DigiKey, Termination=Solder
R1 R2 R3 R4: library part ERJ-6GEYJ200V, "RES SMD 20 OHM 5% 1/8W 0805", Device Package="0805 (2012 Metric)", Manufacturer="Panasonic Electronic Components", Operating Temperature="-55°C ~ 155°C", Power (Watts)="0.125W, 1/8W", Ratings=AEC-Q200, Supplier Device Package=0805, Supplier Part Number 1=P20ACT-ND, Temperature Coefficient=±200ppm/°C, Tolerance=±5%, ComponentLink1Description=Datasheet, ComponentLink1URL=http://industrial.panasonic.com/www-cgi/jvcr13pz.cgi?E+PZ+3+AOA0001+ERJ6GEYJ200V+7+WW, ComponentLink2Description="DigiKey Link", ComponentLink2URL=https://www.digikey.com/en/products/detail/panasonic-electronic-components/ERJ-6GEYJ200V/82980, Composition="Thick Film", Features="Automotive AEC-Q200", Height - Seated (Max)="0.028\" (0.70mm)", lastupdated="05/03/2022 17:15:03", Lifecycle Status=Active, Minimum Order=1, Number of Terminations=2, Package / Case="0805 (2012 Metric)", Packaging=TapeAndReel, Part Number=ERJ-6GEYJ200V, Part Status=Active, partid=47698, Price=0.01, Resistance="20 Ohms", Series=ERJ-6G, Size / Dimension="0.079\" L x 0.049\" W (2.00mm x 1.25mm)", Supplier 1=DigiKey
R5 R6: library part CRCW060375K0FKEAC, "RES 75K OHM 1% 1/10W 0603", Device Package="0603 (1608 Metric)", Manufacturer="Vishay Dale", Operating Temperature="-55°C ~ 155°C", Power (Watts)="0.1W, 1/10W", Supplier Device Package=0603, Supplier Part Number 1=541-5552-1-ND, Temperature Coefficient=±100ppm/°C, Tolerance=±1%, ComponentLink1Description=Datasheet, ComponentLink1URL=https://www.vishay.com/docs/28773/crcwce3.pdf, ComponentLink2Description="DigiKey Link", ComponentLink2URL=https://www.digikey.com/en/products/detail/vishay-dale/CRCW060375K0FKEAC/7924043, Composition="Thick Film", Height - Seated (Max)="0.022\" (0.55mm)", lastupdated="04/03/2022 17:45:17", Lifecycle Status=Active, Minimum Order=1, Number of Terminations=2, Package / Case="0603 (1608 Metric)", Packaging=CutTape, Part Number=CRCW060375K0FKEAC, Part Status=Active, partid=65787, Price=0.01, Resistance="75 kOhms", Series=CRCW-C, Size / Dimension="0.063\" L x 0.031\" W (1.60mm x 0.80mm)", Supplier 1=DigiKey
R7: library part ERJ-P06J103V, "RES SMD 10K OHM 5% 1/2W 0805", Device Package="0805 (2012 Metric)", Manufacturer="Panasonic Electronic Components", Operating Temperature="-55°C ~ 155°C", Power (Watts)="0.5W, 1/2W", Ratings=AEC-Q200, Supplier Device Package=0805, Supplier Part Number 1=P10KADCT-ND, Temperature Coefficient=±200ppm/°C, Tolerance=±5%, ComponentLink1Description=Datasheet, ComponentLink1URL=https://industrial.panasonic.com/cdbs/www-data/pdf/RDO0000/AOA0000C331.pdf, ComponentLink2Description="DigiKey Link", ComponentLink2URL=https://www.digikey.com/en/products/detail/panasonic-electronic-components/ERJ-P06J103V/525198, Composition="Thick Film", Features="Automotive AEC-Q200, Pulse Withstanding", Height - Seated (Max)="0.028\" (0.70mm)", lastupdated="04/03/2022 17:58:19", Lifecycle Status=Active, Minimum Order=1, Number of Terminations=2, Package / Case="0805 (2012 Metric)", Packaging=TapeAndReel, Part Number=ERJ-P06J103V, Part Status=Active, partid=48720, Price=0.02, Resistance="10 kOhms", Series=ERJ-P06, Size / Dimension="0.079\" L x 0.049\" W (2.00mm x 1.25mm)", Supplier 1=DigiKey
R8 R9: library part ERJ-PA3J222V, "RES SMD 2.2K OHM 5% 1/4W 0603", Device Package="0603 (1608 Metric)", Manufacturer="Panasonic Electronic Components", Operating Temperature="-55°C ~ 155°C", Power (Watts)="0.25W, 1/4W", Ratings=AEC-Q200, Supplier Device Package=0603, Supplier Part Number 1=P2.2KBZCT-ND, Temperature Coefficient=±200ppm/°C, Tolerance=±5%, ComponentLink1Description=Datasheet, ComponentLink1URL=https://industrial.panasonic.com/cdbs/www-data/pdf/RDO0000/AOA0000C331.pdf, ComponentLink2Description="DigiKey Link", ComponentLink2URL=https://www.digikey.com/en/products/detail/panasonic-electronic-components/ERJ-PA3J222V/5036018, Composition="Thick Film", Features="Automotive AEC-Q200, Pulse Withstanding", Height - Seated (Max)="0.022\" (0.55mm)", lastupdated="04/03/2022 17:46:44", Lifecycle Status=Active, Minimum Order=1, Number of Terminations=2, Package / Case="0603 (1608 Metric)", Packaging=TapeAndReel, Part Number=ERJ-PA3J222V, Part Status=Active, partid=14127, Price=0.01, Resistance="2.2 kOhms", Series=ERJ-PA3, Size / Dimension="0.063\" L x 0.031\" W (1.60mm x 0.80mm)", Supplier 1=DigiKey
R10 R11 R12 R13: library part WSHP28182L000FEA, "RES 0.002 OHM 1% 10W 2818", Device Package=Nonstandard, Manufacturer="Vishay Dale", Operating Temperature="-65°C ~ 170°C", Power (Watts)=10W, Ratings=AEC-Q200, Supplier Device Package=2818, Supplier Part Number 1=541-3273-1-ND, Temperature Coefficient=±200ppm/°C, Tolerance=±1%, ComponentLink1Description=Datasheet, ComponentLink1URL=http://www.vishay.com/docs/30347/wshp2818.pdf, ComponentLink2Description="DigiKey Link", ComponentLink2URL=http://digikey.com/product-detail/en/vishay-dale/WSHP28182L000FEA/541-3273-1-ND/6605249, Composition="Metal Element", Features="Automotive AEC-Q200, Current Sense, Moisture Resistant, Pulse Withstanding", Height - Seated (Max)="0.069\" (1.75mm)", lastupdated="04/03/2022 18:20:41", Lifecycle Status=Active, Minimum Order=1, Number of Terminations=2, Package / Case=Nonstandard, Packaging=TapeAndReel, Part Number=WSHP28182L000FEA, Part Status=Active, partid=2683, Price=0.90, Resistance="2 mOhms", Series=WSHP2818, Size / Dimension="0.280\" L x 0.181\" W (7.10mm x 4.60mm)", Supplier 1=DigiKey
R14 R16 R17 R18 R19: library part ERJ-PA3J102V, "RES SMD 1K OHM 5% 1/4W 0603", Device Package="0603 (1608 Metric)", Manufacturer="Panasonic Electronic Components", Operating Temperature="-55°C ~ 155°C", Power (Watts)="0.25W, 1/4W", Ratings=AEC-Q200, Supplier Device Package=0603, Supplier Part Number 1=P1KBZCT-ND, Temperature Coefficient=±200ppm/°C, Tolerance=±5%, ComponentLink1Description=Datasheet, ComponentLink1URL=https://industrial.panasonic.com/cdbs/www-data/pdf/RDO0000/AOA0000C331.pdf, ComponentLink2Description="DigiKey Link", ComponentLink2URL=https://www.digikey.com/en/products/detail/panasonic-electronic-components/ERJ-PA3J102V/5035970, Composition="Thick Film", Features="Automotive AEC-Q200, Pulse Withstanding", Height - Seated (Max)="0.022\" (0.55mm)", lastupdated="05/03/2022 17:04:10", Lifecycle Status=Active, Minimum Order=1, Number of Terminations=2, Package / Case="0603 (1608 Metric)", Packaging=TapeAndReel, Part Number=ERJ-PA3J102V, Part Status=Active, partid=17507, Price=0.01, Resistance="1 kOhms", Series=ERJ-PA3, Size / Dimension="0.063\" L x 0.031\" W (1.60mm x 0.80mm)", Supplier 1=DigiKey
R15: library part ERJ-PA3J121V, "RES SMD 120 OHM 5% 1/4W 0603", Device Package="0603 (1608 Metric)", Manufacturer="Panasonic Electronic Components", Operating Temperature="-55°C ~ 155°C", Power (Watts)="0.25W, 1/4W", Ratings=AEC-Q200, Supplier Device Package=0603, Supplier Part Number 1=P120BZCT-ND, Temperature Coefficient=±200ppm/°C, Tolerance=±5%, ComponentLink1Description=Datasheet, ComponentLink1URL=https://industrial.panasonic.com/cdbs/www-data/pdf/RDO0000/AOA0000C331.pdf, ComponentLink2Description="DigiKey Link", ComponentLink2URL=https://www.digikey.com/en/products/detail/panasonic-electronic-components/ERJ-PA3J121V/5035980, Composition="Thick Film", Features="Automotive AEC-Q200, Pulse Withstanding", Height - Seated (Max)="0.022\" (0.55mm)", lastupdated="05/03/2022 17:04:36", Lifecycle Status=Active, Minimum Order=1, Number of Terminations=2, Package / Case="0603 (1608 Metric)", Packaging=TapeAndReel, Part Number=ERJ-PA3J121V, Part Status=Active, partid=8933, Price=0.01, Resistance="120 Ohms", Series=ERJ-PA3, Size / Dimension="0.063\" L x 0.031\" W (1.60mm x 0.80mm)", Supplier 1=DigiKey
S1: "SWITCH SLIDE SPDT 300MA 30V", Current Rating (Amps)="300mA (DC)", Manufacturer=C&K, Supplier Part Number 1=CKN10393-ND, Voltage Rating - DC=30V, Actuator Length=7.00mm, Actuator Type=Standard, Circuit=SPDT, ComponentLink1Description=Datasheet, ComponentLink1URL=//media.digikey.com/pdf/Data%20Sheets/C&K/SK-12F17-G.pdf, ComponentLink2Description="DigiKey Link", ComponentLink2URL=http://digikey.com/product-detail/en/c-k/SK-12F17-G-7/CKN10393-ND/2747163, Contact Finish=Silver, Contact Material=Copper, Contact Timing="Not Specified", lastupdated="22/01/2022 09:16:27", Lifecycle Status=Active, Minimum Order=1, Mounting Type="Through Hole, Right Angle", Packaging=Bulk, Part Number="SK-12F17-G 7", Part Status=Active, partid=3, Price=0.55, Series="SK, COMAX", Supplier 1=DigiKey, Switch Function=On-On, Termination Style="PC Pin"
S2 S3: "SWITCH TACTILE SPST-NO 0.05A 24V", Contact Rating @ Voltage="0.05A @ 24VDC", Manufacturer="TE Connectivity ALCOSWITCH Switches", Operating Force=260gf, Operating Temperature="-40°C ~ 105°C", Supplier Part Number 1=450-2138-1-ND, Actuator Height off PCB, Vertical=7.00mm, Actuator Orientation="Top Actuated", Actuator Type=Standard, Circuit=SPST-NO, ComponentLink1Description=Datasheet, ComponentLink1URL=https://www.te.com/commerce/DocumentDelivery/DDEController?Action=srchrtrv&DocNm=1308111-1_SWITCHES_CORE_PROGRAM_CATALOG&DocType=CS&DocLang=English, ComponentLink2Description="DigiKey Link", ComponentLink2URL=https://www.digikey.com/en/products/detail/te-connectivity-alcoswitch-switches/FSM6JSMAASTR/5343804, Illumination=Non-Illuminated, lastupdated="05/03/2022 17:37:10", Lifecycle Status=Active, Minimum Order=1, Mounting Type="Surface Mount", Outline="6.00mm x 6.00mm", Packaging=TapeAndReel, Part Number=FSM6JSMAASTR, Part Status=Active, Price=0.30, Series=FSMJSMA, Supplier 1=DigiKey, Switch Function=Off-Mom, Termination Style="Gull Wing"

## Via types
v1: diameter 50, hole 28, Top Layer to Bottom Layer, 62 vias
v2: diameter 135.83, hole 135.83, Top Layer to Bottom Layer, tented both sides, 2 vias

## Nets (pads, with @x,y where several pads share a name; then routed paths per layer and width w, separated by ;. In a path a pad name is that pad's centre, name@x,y a point inside that pad or via, vN(x,y) a via of type N, cw(c..) or ccw(c..) an arc to the next point about the centre after c; other vN are vias at no path point)
3V3: C11.2 C12.2 C13.2 IC10.2 IC10.4 IC11.14 R16.2 R17.2 R18.2 R19.2 S1.3 | length 6308.3
  Top Layer w10: IC10.2 IC10.4 ; C11.2 4791.5,5165 4781.5,5155 C12.2 4781.5,4914.49 4894.02,4801.97 IC10.4 ; v1(4894.02,4678) IC10.4 ; R18.2 v1(5291,4245) ; R19.2 v1(5538.98,4245) v1(5758,4245) ; R17.2 5894.29,5110 5894.29,5276.3 R16.2@5895.59,5276.3 ; 5895.59,5200 R16.2@5895.59,5276.3 ; IC11.14 6089.82,4911.18 6090,4911 ; S1.3 6340,4491 6325,4506 6325,4699 6350,4724 6350,4840 6303,4887 6137.75,4887 6113.9,4863.15 C13.2 6090,4911 ; R16.2@5895.59,5276.3 R16.2 5895.59,5318.41 5877,5337 5877,5574 5860,5591 5860,5905 5880,5925 6104,5925 6149,5880 6149,5050 6090,4991 6090,4911
  Layer 1 w10: v1(5291,4245) v1(5538.98,4245) ; v1(5758,4245) 5861.11,4348.11 S1.3
  Bottom Layer w10: v1(4894.02,4678) 5360,4678 5538.98,4499.02 v1(5538.98,4245)
12V: C8.1 C9.1 C10.2 D5.1 D6.1 D7.2 D8.2 IC2.D IC3.D IC4.D IC5.D IC10.3 J2.1 | length 9827.4
  Top Layer w10: J2.1@960.16,3300 960.16,3457.48 1070,3467.48 C8.1 1058.43,4786.57 C9.1 ; J2.1@1420,3300 1420,3457.48 1420,4180 1990,4750 ; 1985.71,4699.53 2017.2,4731.02 ; IC2.D@1991.61,4783 1991.61,4782.01 2017.2,4782.01 2017.2,4731.02 ; D8.2 D8.2@2275,4817 ; 2475.71,4699.53 2481.61,4705.43 ; IC3.D@2507.2,4782.01 IC3.D@2481.61,4782.01 ; 3205.71,4689.53 3211.61,4695.43 ; IC4.D@3237.2,4772.01 IC4.D@3211.61,4772.01 ; D7.2 D7.2@3470,4807 ; 3645.71,4689.53 3651.61,4695.43 ; IC5.D@3677.2,4772.01 IC5.D@3651.61,4772.01 ; v1(4220,3710) D5.1 4272.01,3673.31 v1(4260,3661.3) ; v1(4282,2981) D6.1 ; C10.2 4781.5,4647.95 4720,4709.45 IC10.3 v1(4576.61,4709.45) 3784.94,4709.45 3728.39,4766 3728.39,4772.01 3702.8,4772.01 3702.8,4746.62 3651.61,4695.43 ; 2017.2,4731.02 2042.8,4756.62 2042.8,4782.01 2068.39,4782.01 2068.39,4790 2275,4790 D8.2@2275,4817 ; D8.2@2275,4817 2470,4817 2481.61,4805.39 IC3.D@2481.61,4782.01 ; 2481.61,4705.43 2532.8,4756.62 2532.8,4782.01 2558.39,4782.01 2568.39,4772.01 IC4.D@3211.61,4772.01 ; 2481.61,4705.43 IC3.D@2481.61,4782.01 ; 3211.61,4695.43 3262.8,4746.62 3262.8,4772.01 3288.39,4772.01 3288.39,4788 3470,4788 D7.2@3470,4807 ; 3211.61,4695.43 IC4.D@3211.61,4772.01 ; D7.2@3470,4807 3640,4807 3651.61,4795.39 IC5.D@3651.61,4772.01 ; 3651.61,4695.43 IC5.D@3651.61,4772.01
  Layer 1 w10: J2.1@960.16,3457.48 J2.1@1420,3457.48
  Layer 2 w10: v1(4220,3710) 4220,4352.84 v1(4576.61,4709.45) ; v1(4260,3661.3) 4284.7,3661.3 4360,3586 4360,3534 4282,3456 v1(4282,2981)
EN: IC1.3 J3.1 R14.2 | length 4141
  Top Layer w10: v1(4346,3695) 4366,3675 IC1.3 ; J3.1 5947.32,5812.32 5947.32,5056.3 5933,5041.97 5933,4455.76 6107.58,4281.18 ; v1(6060.18,4281.18) 6107.58,4281.18 ; R14.2 6107.58,4281.18
  Bottom Layer w10: v1(4346,3695) 4220,3821 4220,3886 4240,3906 4282,3906 4341,3847 5626,3847 v1(6060.18,4281.18)
GATEH_A: D1.1 IC4.G IC5.G R1.2 | length 3159.8
  Top Layer w10: IC4.G 3354.39,4583.56 3691.94,4583.56 3731.39,4623 ; D1.1 4790,2880 4762,2852 4600,2852 4575.55,2876.45 R1.2 4575.55,2958.45 4537,2997 4537,3437.67 4544.33,3445 4544.33,3786.22 4452,3878.55 4452,4293 4256,4489 3865.39,4489 3731.39,4623 ; 3731.39,4623 3728.39,4626 IC5.G 3731.39,4623
GATEH_B: D2.1 IC2.G IC3.G R2.2 | length 3458.3
  Top Layer w10: IC2.G 2068.39,4658 v1(2159,4658) ; v1(2558.39,4611) IC3.G ; R2.2 4634.45,4122.55 v1(4674,4083) ; v1(4770,3922) 4790,3942 D2.1
  Layer 1 w10: v1(2159,4658) 2511.39,4658 v1(2558.39,4611)
  Layer 2 w10: v1(4674,4083) 4770,3987 v1(4770,3922)
  Bottom Layer w10: v1(2558.39,4611) 2585.83,4583.56 4108.44,4583.56 v1(4770,3922)
GATEL_A: D3.1 IC7.G IC9.G R3.2 | length 2853.8
  Top Layer w10: IC7.G 3168.39,2994.61 v1(3387,2776) ; IC9.G 3638.39,2976 3929.39,2685 4360,2685 4410,2735 v1(4410,2776) v1(4410,2852) D3.1 ; R3.2 4602,3110 v1(4602,3044)
  Layer 1 w10: v1(4410,2852) v1(4602,3044)
  Bottom Layer w10: v1(3387,2776) v1(4410,2776)
GATEL_B: D4.1 IC6.G IC8.G R4.2 | length 3342.4
  Top Layer w10: v1(2208.39,2921) IC8.G ; v1(2604.39,2921) 2668.39,2985 IC6.G 2668.39,3020 2737,3088.61 2737,3430 2747,3440 3636,3440 4203,4007 4385,4007 D4.1 v1(4385,3927) ; v1(4628.9,3927) R4.2
  Layer 1 w10: v1(2208.39,2921) v1(2604.39,2921) ; v1(4385,3927) v1(4628.9,3927)
GND: C1.1 C2.1 C3.1 C4.1 C8.2 C9.2 C10.1 C11.1 C12.1 C13.1 C14.1 C15.1 D13.2 IC1.4 IC10.1 IC11.7 J2.2 J3.6 J4.2 R5.1 R6.1 R10.2 R11.1 R12.2 R13.1 S1.1 S2.1 S2.2 S3.1 S3.2 | length 18831
  Top Layer w10: C9.2 861.58,4780.57 873.15,4769 C8.2 873.15,4418.15 853,4398 853,2949.93 936,2866.93 960.16,2866.93 J2.2@960.16,2709.45 ; J2.2@1420,2866.93 1420,2709.45 1420,2490 1440.9,2469.1 R11.1 2392,2469.1 R13.1 2952.09,2460 R10.2 3500.9,2459.1 R12.2 4465,2459.1 4507,2501.1 4507,3465 4524.33,3482.33 4524.33,3584.67 v1(4484,3625) IC1.4 4296,3625 4184.41,3513.41 R5.1 R6.1 ; v1(4577.45,4891) 4577.9,4890.55 IC10.1 4689.06,4890.55 4718.5,4920 C12.1 4718.5,5155 4728.5,5165 C11.1 4728.5,5363.5 4819.06,5454.06 5040.44,5454.06 5054.5,5440 5054.5,5410.5 J4.2 5080,5445 J3.6 5588.58,5796.42 S3.1 5588.58,4850 5588.58,4760 ; v1(4711,4443) 4718.5,4450.5 C10.1 ; C4.1 5000,3228 C3.1 5010,3458 C2.1 5005,3673 C1.1 5005,4309 5018,4322 ; C14.1 5048.43,4352.43 5018,4322 ; S2.1 S2.2 5275.72,4728 5531.45,4728 S3.2 S3.2@5588.58,4707 ; v1(5351,4430) C15.1 5441.85,4320 5201.85,4080 5121.85,4080 5018,4183.85 5018,4322 ; IC11.7 5821.5,4757.64 5795.86,4732 ; v1(5844,4732) 5795.86,4732 ; v1(6154,4836) 6128,4810 C13.1 6090,4487 6292,4285 6370,4285 6395,4260 6395,4166.89 ; S1.1 6395,4166.89 ; D13.2 6493,4586.41 6493,4264.89 6395,4166.89 ; S3.2@5588.58,4707 5588.58,4760 ; S3.2@5588.58,4707 5770.86,4707 5795.86,4732 ; 5588.58,4760 5616.58,4732 5795.86,4732
  Layer 1 w10: J2.2@960.16,2709.45 J2.2@1420,2709.45 ; v1(5844,4732) 5948,4836 v1(6154,4836)
  Layer 2 w10: v1(4484,3625) 4535,3625 4810,3900 4810,4344 v1(4711,4443) 4711,4757.45 v1(4577.45,4891)
  Bottom Layer w10: v1(4711,4443) 4724,4430 v1(5351,4430)
HIGHIN_A: C14.2 IC1.7 IC11.1 J3.2 R18.1 S2.3 S2.4 | length 5274.2
  Top Layer w10: v1(4346,3455) 4366,3475 IC1.7 ; S2.3 v1(5041.42,4938) S2.4 5041.42,4581.16 5101.57,4521 C14.2 5101.57,4360.76 5053.82,4313 R18.1 ; IC11.1 5840,4911.18 ; v1(5862,4810) 5862,4889.18 5840,4911.18 ; J3.2 5910,5343.32 5927.32,5326 5927.32,5083.32 5894,5050 5894,4960 5845.18,4911.18 5840,4911.18
  Layer 1 w10: v1(4346,3455) 4441,3550 4972,3550 5598,4176 5598,4546 v1(5862,4810) 5754,4810 5626,4938 v1(5041.42,4938)
HIGHIN_B: C15.2 IC1.2 IC11.3 J3.4 R19.1 S3.3 S3.4 | length 4405
  Top Layer w10: IC1.2 v1(4484,3725) ; S3.3 v1(5411.42,5100) 5351.42,5160 5247.42,5160 5176,5088.58 5176,4620 5197,4599 5390.42,4599 5411.42,4620 S3.4 5440,4670.87 5495,4615.87 C15.2 5495,4323 5437,4265 R19.1 v1(5434.41,4130.41) ; IC11.3 v1(5821,4860)
  Layer 1 w10: v1(4484,3725) 4763,3725 5168.41,4130.41 v1(5434.41,4130.41) ; v1(5411.42,5100) 5581,5100 v1(5821,4860)
  Layer 2 w10: v1(5411.42,5100) 5710,5398.58 J3.4
HIGHOUT_A: D1.2 IC1.11 R1.1 | length 498.7
  Top Layer w10: R1.1 4644.45,2958 4698,2958 4790,3050 D1.2 4790,3204 4785.04,3208.96 IC1.11
HIGHOUT_B: D2.2 IC1.20 R2.1 | length 783.4
  Top Layer w10: R2.1 4565.55,4220 4596.55,4251 4760,4251 4790,4221 D2.2 4790,4106 4730,4046 4730,3874.57 4785.04,3819.53 IC1.20
HIGHSRC_A: C6.1 D7.1 D9.2 D11.2 IC1.12 IC4.S IC5.S IC7.D IC9.D J1.2 R7.1 R9.1 | length 7414.7
  Top Layer w10: R9.1 2925.59,4593.94 D9.2 3040,4650 3040.43,4649.57 3211.61,4649.57 IC4.S@3237.2,4649.57 ; v1(3083.07,3390) R7.1 2994.45,3312.76 3117.2,3190 IC7.D@3117.2,3142.01 ; 3085.71,3059.53 3117.2,3091.02 ; IC7.D@3091.61,3142.01 IC7.D@3117.2,3142.01 ; J1.2@3240.55,3800 3240.55,4259.84 3240.55,4453 3237.2,4456.35 IC4.S@3237.2,4649.57 ; IC4.S@3262.8,4649.57 IC4.S@3237.2,4649.57 ; D11.2 D11.2@3360,3169 ; v1(3532,4624) 3470,4624 D7.1 3639.92,4661.26 3651.61,4649.57 3677.2,4649.57 IC5.S@3702.8,4649.57 ; 3555.71,3039.53 3587.2,3071.02 ; IC9.D@3638.39,3122.01 3612.8,3122.01 3612.8,3096.62 3587.2,3071.02 ; v1(4212,2732) 4188.5,2755.5 C6.1 3969,2830 3659,3140 3587.2,3140 IC9.D@3587.2,3122.01 ; v1(4628,3375) IC1.12 ; 3117.2,3091.02 3142.8,3116.62 3142.8,3142.01 3168.39,3142.01 3168.39,3157.39 3180,3169 D11.2@3360,3169 ; 3117.2,3091.02 IC7.D@3117.2,3142.01 ; D11.2@3360,3169 3360,3217.95 3550,3217.95 3561.61,3206.34 3561.61,3122.01 IC9.D@3587.2,3122.01 ; 3587.2,3071.02 IC9.D@3587.2,3122.01
  Layer 1 w10: J1.2@3083.07,3800 J1.2@3240.55,3800 ; J1.2@3083.07,4259.84 J1.2@3240.55,4259.84
  Layer 2 w10: v1(3083.07,3390) J1.2@3083.07,3800 ; v1(4212,2732) 4628,3148 v1(4628,3375)
  Bottom Layer w10: J1.2@3083.07,4259.84 3083.07,4284 2992,4284 2730,4546 2560,4546 2518,4588 2518,4644 2540,4666 3490,4666 v1(3532,4624)
HIGHSRC_B: C5.1 C7.2 D8.1 D10.2 D12.2 IC1.19 IC2.S IC3.S IC6.D IC8.D J1.1 R8.2 | length 7538.9
  Top Layer w10: IC2.S@1991.61,4659.57 2017.2,4659.57 2042.8,4659.57 2042.8,4628 2410.95,4259.84 J1.1@2492.52,4259.84 ; 2125.71,3069.53 2157.2,3101.02 ; IC8.D@2131.61,3152.01 2157.2,3152.01 2157.2,3101.02 ; J1.1@2492.52,3800 J1.1@2492.52,4259.84 ; IC3.S@2532.8,4659.57 2507.2,4659.57 2481.61,4659.57 2469.92,4671.26 D8.1 2275,4477.36 J1.1@2492.52,4259.84 ; 2585.71,3059.53 2591.61,3065.43 ; IC6.D@2617.2,3142.01 IC6.D@2591.61,3142.01 ; J1.1@2650,3800 2650,3701 2420,3471 D12.2 D12.2@2420,3181 ; v1(2650,4470) D10.2 2744.41,4536.06 R8.2 ; IC6.D@2668.39,3142.01 2642.8,3142.01 2642.8,3116.62 2591.61,3065.43 ; v1(2778.5,3318) C7.2 ; v1(4175.98,3888) 4183.98,3888 4232.99,3838.99 ; C5.1 4232.99,3838.99 ; v1(4287.01,3838.99) 4232.99,3838.99 ; IC1.19 v1(4854,3725) ; 2157.2,3101.02 2182.8,3126.62 2182.8,3152.01 2208.39,3152.01 2208.39,3170 2219.39,3181 D12.2@2420,3181 ; D12.2@2420,3181 2420,3176 2580,3176 2591.61,3164.39 IC6.D@2591.61,3142.01 ; 2591.61,3065.43 IC6.D@2591.61,3142.01
  Layer 1 w10: J1.1@2492.52,3800 2650,3800 2650,3680 2698,3632 3919.98,3632 v1(4175.98,3888) ; J1.1@2492.52,4259.84 2650,4259.84 v1(2650,4470)
  Layer 2 w10: J1.1@2650,3800 2650,3446.5 v1(2778.5,3318)
  Bottom Layer w10: v1(4287.01,3838.99) 4317,3809 4770,3809 v1(4854,3725)
LEDPWR: D13.1 R15.2 | length 390
  Top Layer w10: R15.2 v1(6309,4740) ; D13.1 6396,4624.35 v1(6396,4578)
  Layer 2 w10: v1(6309,4740) 6309,4665 v1(6396,4578)
LOWIN_A: IC1.6 IC11.2 J3.3 R16.1 | length 3606.3
  Top Layer w10: IC1.6 4464,3525 v1(4484,3505) ; v1(5699,5240) 5749,5290 R16.1 ; IC11.2 5720,4885.59 5698.5,4907.09 5698.5,5054.5 5844.41,5200.41 R16.1 ; J3.3 5810,5300 R16.1
  Layer 2 w10: v1(4484,3505) 5699,4720 v1(5699,5240)
LOWIN_B: IC1.5 IC11.4 J3.5 R17.1 | length 3855
  Top Layer w10: v1(4305,3575) IC1.5 ; v1(5638.5,4783.23) 5689.69,4834.41 IC11.4 ; v1(5760,5058) 5812,5110 R17.1 v1(5844.41,5026.18)